# Altium PCB PCB1-V2.PcbDoc
Units mm, origin at the board's own origin, x right, y up, seen from the top; angles counter-clockwise.
Board outline 51.43 x 39.37 mm, 2 copper layers (Top Layer, Bottom Layer), stack 0.833 mm thick; 72 components, 40 nets, 220 pads, 157 vias.
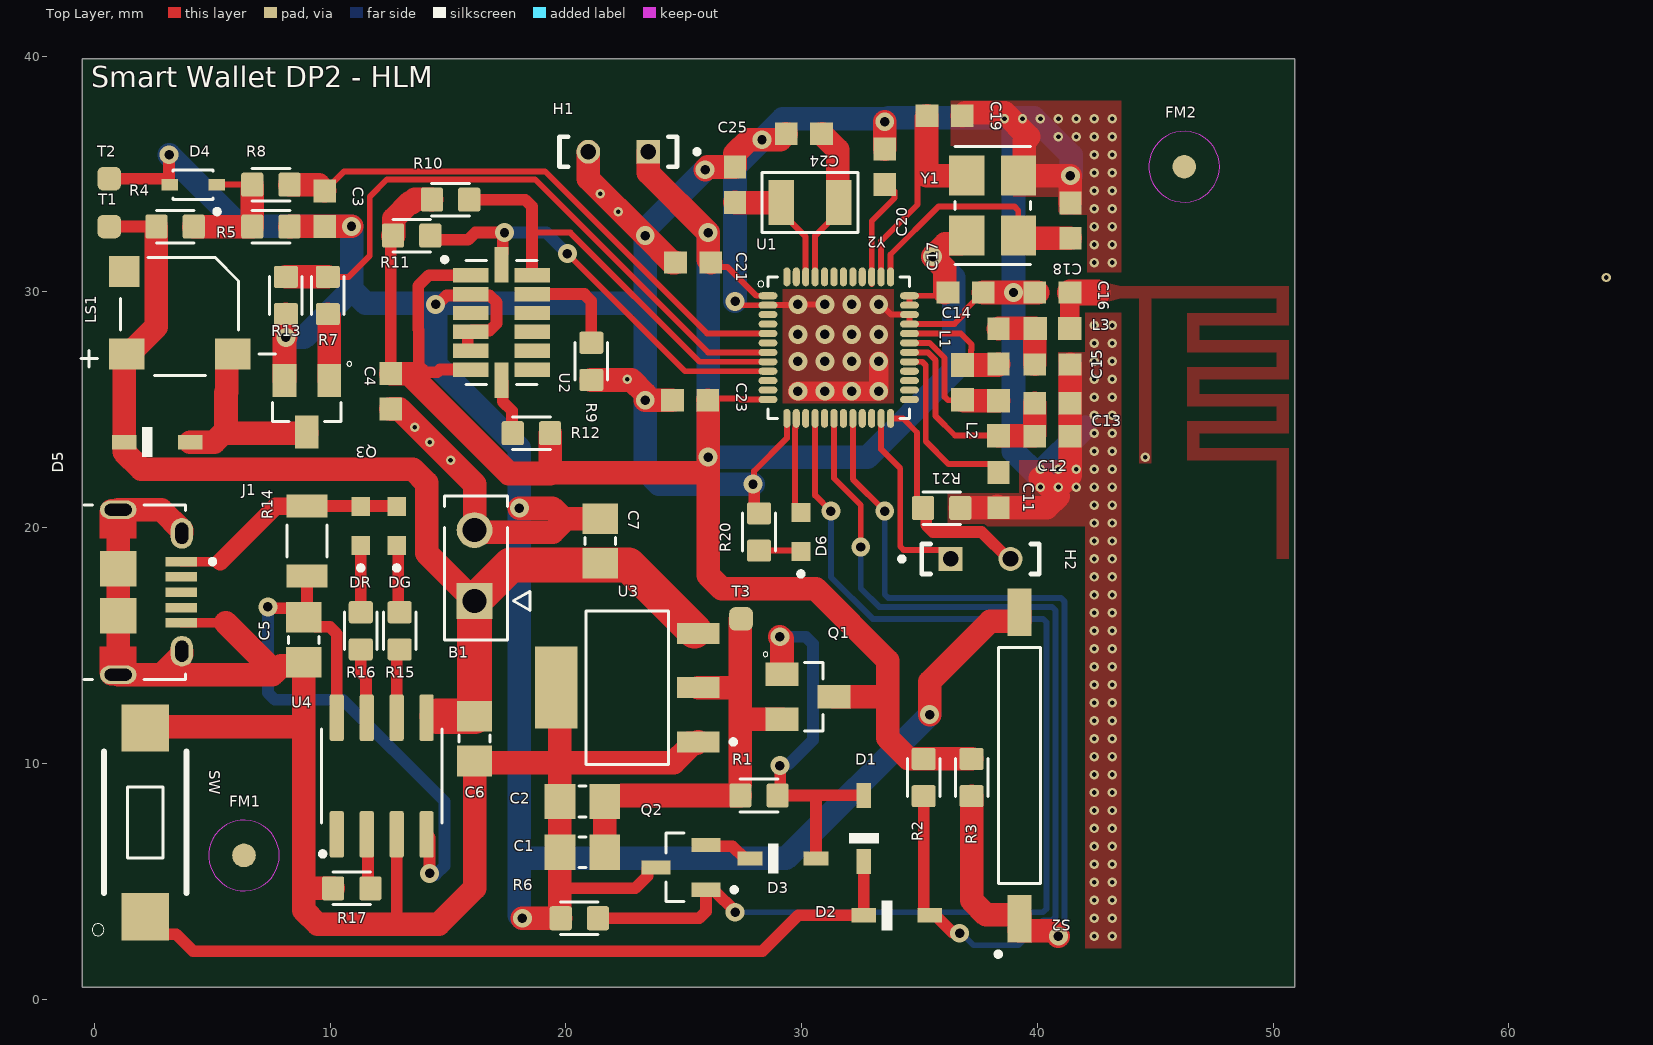
[diagram p0: Top Layer view]
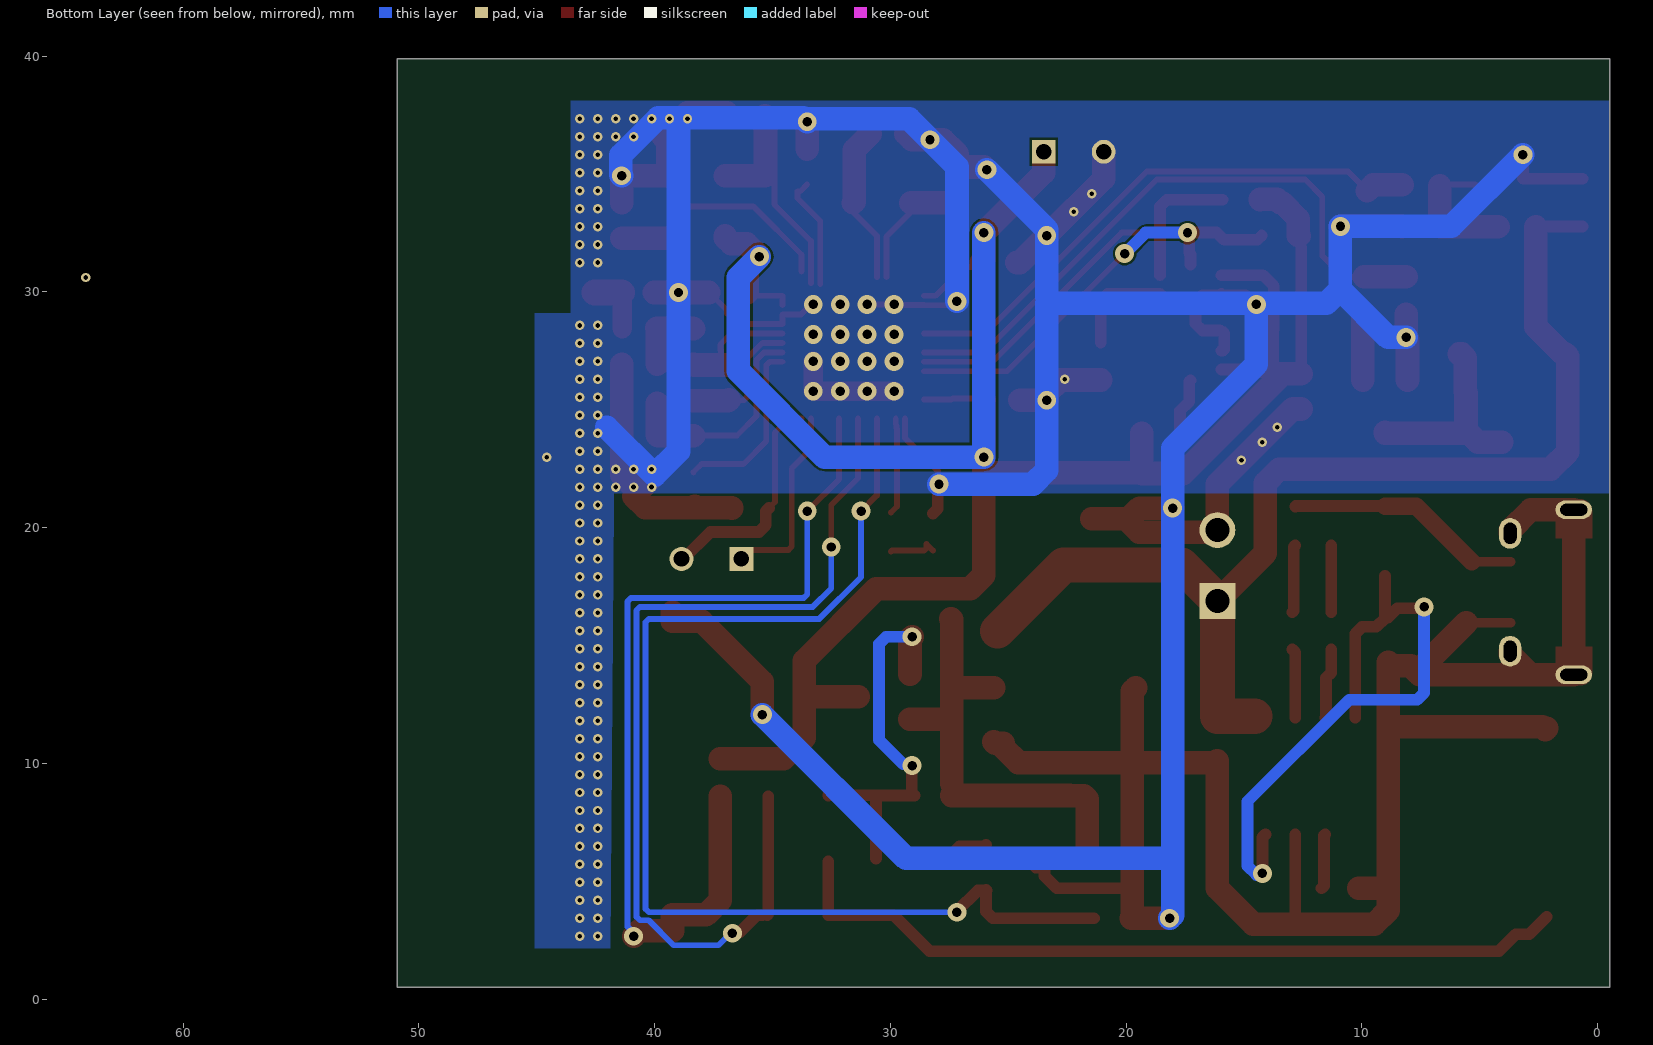
[diagram p1: Bottom Layer view, seen from below]
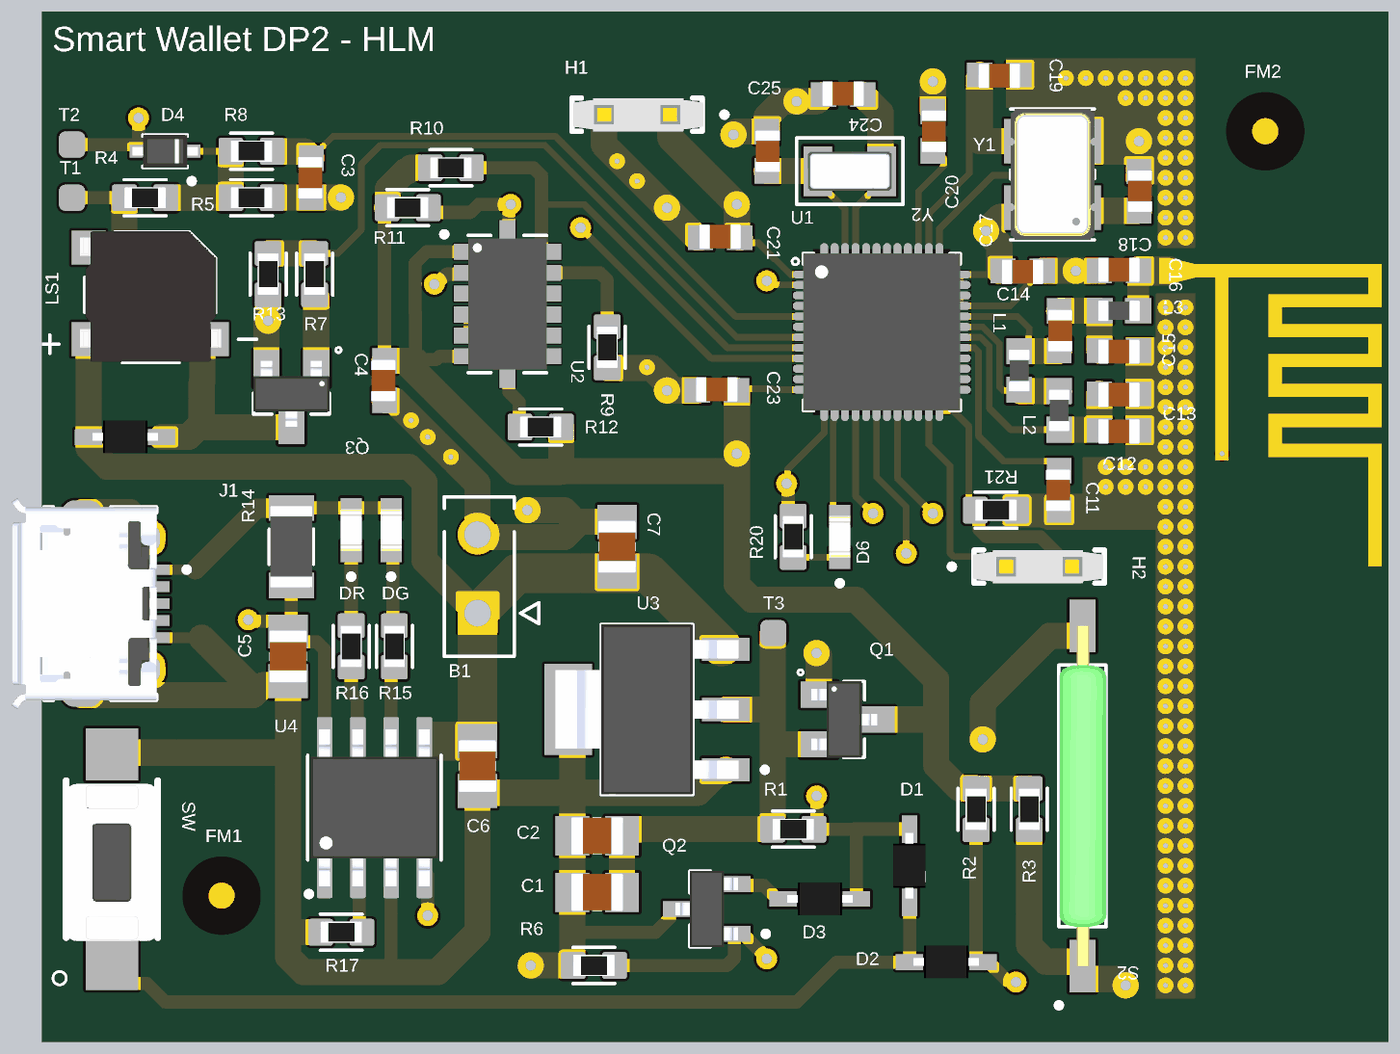
[diagram p2: 3D render of the assembled board from above, using the file's embedded part models]

## Layer stack, top to bottom
Top Solder: solder mask 0.0102, Solder Resist, Dk 3.5
Top Layer: signal copper 0.0356
Dielectric 1: dielectric 0.762, FR-4, Dk 4.8
Bottom Layer: signal copper 0.0356
Bottom Solder: solder mask 0.0102, Solder Resist, Dk 3.5

## Board outline
-0.508,0.508 50.927,0.508 50.927,39.878 -0.508,39.878

## Design rules (kind name [scope] priority, off if disabled: settings)
Clearance [All] p1: gap=0.09 ignorepadtopadclearanceinfootprint=FALSE
DiffPairsRouting [All] p1: maxlimit=0.254 minlimit=0.254 mostfreqgap=0.254 toplayer_minwidth=0.25 toplayer_maxwidth=0.5 toplayer_prefwidth=0.381 bottomlayer_minwidth=0.25 bottomlayer_maxwidth=0.5 bottomlayer_prefwidth=0.381 maxuncoupledlength=12.7
HoleSize [All] p1: absolutevalues=TRUE maxlimit=3.5 minlimit=0.025 maxpercent=80.000 minpercent=20.000
MinimumSolderMaskSliver [All] p1: minsoldermaskwidth=0.04
PolygonConnect [All] p1: connectstyle=Direct reliefconductorwidth=0.254 reliefentries=4 polygonreliefangle="90 Angle" airgapwidth=0.254
RoutingVias [All] p1: holewidth=3.6 width=7 viastyle="Through Hole" minholewidth=0.711 minwidth=1.27 maxholewidth=3.6 maxwidth=7 useviatemplates=TRUE viatemplateguid#1={999FEDD0-366D-4469-89EB-84A90AEF3A53} viatemplateguid#2={0AFC9970-2C97-4F59-B343-C81B69264AC9} viatemplatename#1=v40h20 viatemplatename#2=v80h40
SilkToSolderMaskClearance [IsPad] p1: minsilkscreentomaskgap=0.086 clearancetoexposedcopper=TRUE
SolderMaskExpansion [All] p1: expansion=0.102 istentingtop=FALSE
SupplyNets "Schematic Supply Nets_4" [InNet('OUT')] p1: voltage=0.000
SupplyNets "Schematic Supply Nets_3" [InNet('5V')] p2: voltage=0.000
SupplyNets "Schematic Supply Nets_2" [InNet('GND')] p3: voltage=0.000
SupplyNets "Schematic Supply Nets_1" [InNet('3V3')] p4: voltage=0.000
SupplyNets "Schematic Supply Nets" [InNet('VCC')] p5: voltage=0.000
UnRoutedNet [All] p1 off:
Width [All] p1: maxlimit=1.5 minlimit=0.25 preferedwidth=1 bottomlayer_maxwidth=1 bottomlayer_prefwidth=0.5 minimp=50.000000 maximp=50.000000 favimp=50.000000
25 further rules are at their usual default settings.

## Components (designator, comment, footprint, x,y, rotation, side; value= is the part's Value field where it differs from the comment)
B1 "Molex" MOLEX_430450227 16.129,16.891 r0 top
C1 "4.7uF" CAPC2012X135N 20.701,6.223 r180 top
C2 "0.1uF" CAPC2012X135N 20.701,8.382 r180 top
C3 "0.1uF" CAPC1608X94N 9.779,33.528 r270 top
C4 "Capacitor" CAPC1608X94N 12.573,25.781 r270 top
C5 "10uF" CAPC2012X135N 8.89,15.24 r270 top
C6 "10uF" CAPC2012X135N 16.129,11.049 r270 top
C7 "1uF" CAPC2012X135N 21.463,19.431 r90 top
C11 "0.1uF" CAPC1608X94N 38.354,21.59 r270 top
C12 "2.2nF" CAPC1608X94N 40.64,23.876 r0 top
C13 "0.5pF" CAPC1608X94N 40.64,25.273 r0 top
C14 "2pF" CAPC1608X94N 38.354,27.686 r90 top
C15 "0.5pF" CAPC1608X94N 40.64,26.924 r0 top
C16 "1.5pF" CAPC1608X94N 40.64,29.972 r180 top
C17 "0.1uF" CAPC1608X94N 36.957,29.972 r0 top
C18 "22pF" CAPC1608X94N 41.402,33.02 r90 top
C19 "22pF" CAPC1608X94N 36.068,37.465 r0 top
C20 "0.1uF" CAPC1608X94N 33.528,35.306 r90 top
C21 "0.1uF" CAPC1608X94N 25.4,31.242 r180 top
C23 "0.1uF" CAPC1608X94N 25.273,25.4 r180 top
C24 "22pF" CAPC1608X94N 30.099,36.703 r180 top
C25 "22pF" CAPC1608X94N 27.178,34.544 r90 top
D1 "1N4148WS" 1N4148WS 32.639,7.239 r90 top
D2 "1N4148WS" 1N4148WS 34.036,3.556 r0 top
D3 "1N4148WS" 1N4148WS 29.21,5.969 r0 top
D4 "Zener 3.6v" DIO_BZT52C3V6S 4.191,34.544 r180 top
D5 "1N4148WS" 1N4148WS 2.667,23.622 r0 top
D6 "LED Test" LED_KP-1608SURCK 29.972,19.812 r90 top
DG "LG" LED_KP-1608SURCK 12.827,20.066 r90 top
DR "LR" LED_KP-1608SURCK 11.303,20.066 r90 top
FM1 "Fiducial" Fiducial 6.35,6.096 r0 top
FM2 "Fiducial" Fiducial 46.228,35.306 r0 top
H1 "Header" SAMTEC_TMS-101-51-G-D 22.225,35.941 r270 top
H2 "Header" SAMTEC_TMS-101-51-G-D 37.592,18.669 r90 top
J1 "MicroUSB Type B" MicroUSB 1.016,17.256 r270 top
L1 "3.3nH" INDC1608X95N 36.83,26.162 r90 top
L2 "10nH" INDC1608X95N 38.354,24.638 r90 top
L3 "3.3nH" INDC1608X95N 40.64,28.448 r0 top
LS1 "SMT-0540-S-R" SMT-0540-S-R 3.62,28.961 r0 top
Q1 "FDN340P" SOT95P240X120-3N 30.269,12.827 r0 top
Q2 "BSS138LT1G" SOT95P237X111-3N 24.892,5.588 r180 top
Q3 "MMBT2222A" SOT95P240X120-3N 9.017,25.146 r270 top
R1 "10kΩ" RESC1608X50N 28.194,8.636 r180 top
R2 "10kΩ" RESC1608X50N 35.179,9.398 r270 top
R3 "220Ω" RESC1608X50N 37.211,9.398 r270 top
R4 "10KΩ" RESC1608X50N 3.429,32.766 r0 top
R5 "10KΩ" RESC1608X50N 7.493,32.766 r180 top
R6 "1MΩ" RESC1608X50N 20.574,3.429 r0 top
R7 "220Ω" RESC1608X50N 9.906,29.845 r90 top
R8 "10Ω" RESC1608X50N 7.493,34.544 r180 top
R9 "4.7kΩ" RESC1608X50N 21.082,27.051 r270 top
R10 "4.7kΩ" RESC1608X50N 15.113,33.909 r180 top
R11 "4.7kΩ" RESC1608X50N 13.462,32.385 r180 top
R12 "10kΩ" RESC1608X50N 18.542,24.003 r0 top
R13 "1MΩ" RESC1608X50N 8.128,29.845 r90 top
R14 "0.4 Ω" RESC3116X65N 9.017,19.431 r90 top
R15 "1kΩ" RESC1608X50N 12.954,15.621 r90 top
R16 "1kΩ" RESC1608X50N 11.303,15.621 r90 top
R17 "1.2kΩ" RESC1608X50N 10.922,4.699 r180 top
R20 "220Ω" RESC1608X50N 28.194,19.812 r270 top
R21 "10k" RESC1608X50N 35.941,20.828 r180 top
S2 "Reed Switch" SW_PMC-1001S1015 39.243,9.906 r90 top
SW "Push Button" SW_RS-032G05A3-SMRT 2.159,7.493 r90 top
T1 "TestPoint VCC" Testpoint1 0.635,32.766 r0 top
T2 "TestPoint GND" Testpoint1 0.635,34.798 r0 top
T3 "TestPoint 3.3V" Testpoint1 27.432,16.129 r0 top
U1 "NRF51822-QFAA-R7" nRf51822 31.575,27.632 r0 top
U2 "ADXL345" PQFN80P500X300X100-14N 17.272,28.702 r0 top
U3 "AP7361-33ER-13" *SOT230P700X180-4N 22.606,13.208 r180 top
U4 "TP4056" tp4056 12.192,9.46 r90 top
Y1 "ASFL1-16.000MHZ-EC-T" XTAL_ASFL1-16.000MHZ-EC-T 38.1,33.655 r180 top
Y2 "32.768KHZ" XTAL320X150X75 30.353,33.782 r180 top

## Footprints (in the part's own frame and the unit in brackets; to place one, negate y for a bottom-side part, rotate by r counter-clockwise, add the part's x,y. Pads: shape width x height; smd on the part's side, far side on the other; paste and mask are expansions set on the pad)
1N4148WS [mm] "SOD323"
  rect 1.05x0.6 smd: A(1.4,0) C(-1.4,0)
  silkscreen extent -0.63,-0.63 -0.2,0.63, body extent -1.25,-0.62 1.25,0.64, height 1.1
*SOT230P700X180-4N [mm]
  rect 1.81x0.89 smd: 1(-3.01,2.3) 2(-3.01,0) 3(-3.01,-2.3)
  rect 1.81x3.481 smd: 4(3.01,0)
  silkscreen extent -4.6,-3.25 1.75,3.25, body extent -3.5,-3.25 3.5,3.25, height 1.63
CAPC1608X94N [mm]
  rect 0.97x0.94 smd: 1(-0.75,0) 2(0.75,0)
  body extent -0.8,-0.51 0.8,0.43, height 0.8
CAPC2012X135N [mm]
  rect 1.3x1.5 smd: 1(-0.95,0) 2(0.95,0)
  silkscreen extent -0.15,-0.65 0.15,0.65, body extent -1,-0.72 1,0.72, height 1.22
DIO_BZT52C3V6S [mm]
  rect 0.7x0.5 smd: A(1,0) C(-1,0)
  silkscreen extent -1.12,-0.63 0.85,1.24, body extent -1.25,-0.63 1.25,0.63, height 1.1
Fiducial [mm]
  round 1 smd paste-1 mask+1: 1(0,0)
  Top Layer keep-out circle w0.01: c0,0 r1.5
  body extent -0.5,-0.5 0.5,0.5
INDC1608X95N [mm]
  rect 1x0.97 smd: 1(-0.735,0) 2(0.735,0)
  body extent -0.8,-0.4 0.8,0.4, height 0.95
LED_KP-1608SURCK [mm]
  rect 0.8x0.8 smd: 1(0.825,0) 2(-0.825,0)
  silkscreen extent -1.88,-0.1 -1.68,0.1, body extent -0.8,-0.4 0.8,0.4, height 1.1
MicroUSB [mm]
  rect 0.4x1.35 smd: 1(-1.3,2.675) 2(-0.65,2.675) 3(0,2.675) 4(0.65,2.675) 5(1.3,2.675)
  oval 0.775x1.55 hole 0.5 slot 1.15 at 90 deg mask+0: SH1(-3.5,0) SH4(3.5,0)
  rect 1.5x1.55 smd: SH2(1,0) SH3(-1,0)
  oval 1.3x0.95 hole 0.55 slot 0.9 at 0 deg: SH5(-2.5,2.7) SH6(2.5,2.7)
  Top Layer region: 3.471,0.774 3.497,0.772 3.523,0.769 3.549,0.764 3.574,0.758 3.6,0.751 3.624,0.742 3.648,0.732 3.672,0.721 3.695,0.708 3.717,0.694 3.739,0.68 3.76,0.664 3.78,0.647 3.799,0.629 3.817,0.61 3.834,0.59 3.85,0.569 3.864,0.547 3.878,0.525 3.891,0.502 3.902,0.478 3.912,0.454 3.921,0.43 3.928,0.404 3.934,0.379 3.939,0.353 3.942,0.327 3.944,0.301 3.945,0.275 3.945,-0.275 3.944,-0.301 3.942,-0.327 3.939,-0.353 3.934,-0.379 3.928,-0.404 3.921,-0.43 3.912,-0.454 3.902,-0.478 3.891,-0.502 3.878,-0.525 3.864,-0.547 3.85,-0.569 3.834,-0.59 3.817,-0.61 3.799,-0.629 3.78,-0.647 3.76,-0.664 3.739,-0.68 3.717,-0.694 3.695,-0.708 3.672,-0.721 3.648,-0.732 3.624,-0.742 3.6,-0.751 3.574,-0.758 3.549,-0.764 3.523,-0.769 3.497,-0.772 3.471,-0.774 3.445,-0.775 2.3,-0.775 2.3,0.775 3.445,0.775
  Top Layer region: -2.3,-0.775 -3.445,-0.775 -3.471,-0.774 -3.497,-0.772 -3.523,-0.769 -3.549,-0.764 -3.574,-0.758 -3.6,-0.751 -3.624,-0.742 -3.648,-0.732 -3.672,-0.721 -3.695,-0.708 -3.717,-0.694 -3.739,-0.68 -3.76,-0.664 -3.78,-0.647 -3.799,-0.629 -3.817,-0.61 -3.834,-0.59 -3.85,-0.569 -3.864,-0.547 -3.878,-0.525 -3.891,-0.502 -3.902,-0.478 -3.912,-0.454 -3.921,-0.43 -3.928,-0.404 -3.934,-0.379 -3.939,-0.353 -3.942,-0.327 -3.944,-0.301 -3.945,-0.275 -3.945,0.275 -3.944,0.301 -3.942,0.327 -3.939,0.353 -3.934,0.379 -3.928,0.404 -3.921,0.43 -3.912,0.454 -3.902,0.478 -3.891,0.502 -3.878,0.525 -3.864,0.547 -3.85,0.569 -3.834,0.59 -3.817,0.61 -3.799,0.629 -3.78,0.647 -3.76,0.664 -3.739,0.68 -3.717,0.694 -3.695,0.708 -3.672,0.721 -3.648,0.732 -3.624,0.742 -3.6,0.751 -3.574,0.758 -3.549,0.764 -3.523,0.769 -3.497,0.772 -3.471,0.774 -3.445,0.775 -2.3,0.775
  silkscreen extent -3.7,-1.45 3.7,4.1, body extent -4.02,-2.68 4.02,2.85, height 2.67
MOLEX_430450227 [mm]
  rect 1.52x1.52 / inner round 1.52 / far side rect 1.52x1.52 hole 1.02 mask+0.076: 1(0,0)
  round 1.52 hole 1.02 mask+0.076: 2(0,3)
  silkscreen extent -1.27,-1.65 2.34,4.44
nRf51822 [mm]
  oval 0.8x0.3 smd mask+0: 1(-3,2.2) 2(-3,1.8) 3(-3,1.4) 4(-3,1) 5(-3,0.6) 6(-3,0.2) 7(-3,-0.2) 8(-3,-0.6) 9(-3,-1) 10(-3,-1.4) 11(-3,-1.8) 12(-3,-2.2) 25(3,-2.2) 26(3,-1.8) 27(3,-1.4) 28(3,-1) 29(3,-0.6) 30(3,-0.2) 31(3,0.2) 32(3,0.6) 33(3,1) 34(3,1.4) 35(3,1.8) 36(3,2.2)
  oval 0.3x0.8 smd mask+0: 13(-2.2,-3) 14(-1.8,-3) 15(-1.4,-3) 16(-1,-3) 17(-0.6,-3) 18(-0.2,-3) 19(0.2,-3) 20(0.6,-3) 21(1,-3) 22(1.4,-3) 23(1.8,-3) 24(2.2,-3) 37(2.2,3) 38(1.8,3) 39(1.4,3) 40(1,3) 41(0.6,3) 42(0.2,3) 43(-0.2,3) 44(-0.6,3) 45(-1,3) 46(-1.4,3) 47(-1.8,3) 48(-2.2,3)
  silkscreen extent -3.43,-3 3,3, body extent -3,-3 3,3, height 0.93
PQFN80P500X300X100-14N [mm]
  rect 1.5x0.61 smd mask+0.05: 1(-1.3,2) 2(-1.3,1.2) 3(-1.3,0.4) 4(-1.3,-0.4) 5(-1.3,-1.2) 6(-1.3,-2) 8(1.3,-2) 9(1.3,-1.2) 10(1.3,-0.4) 11(1.3,0.4) 12(1.3,1.2) 13(1.3,2)
  rect 0.61x1.5 smd mask+0.05: 7(0,-2.45) 14(0,2.45)
  silkscreen extent -2.51,-2.63 1.5,2.77, body extent -1.5,-2.5 1.5,2.5, height 1
RESC1608X50N [mm]
  rrect20% 0.94x1.02 smd: 1(-0.79,0) 2(0.79,0)
  silkscreen extent -0.8,-0.69 0.8,0.69, body extent -0.8,-0.4 0.8,0.4, height 0.43
RESC3116X65N [mm]
  rect 0.97x1.73 smd: 1(-1.48,0) 2(1.48,0)
  silkscreen extent -0.67,-0.85 0.67,0.85, body extent -1.55,-0.8 1.55,0.8, height 0.65
SAMTEC_TMS-101-51-G-D [mm]
  rect 1.01x1.01 / inner round 1.01 / far side rect 1.01x1.01 hole 0.66: 01(0,1.27)
  round 1.01 hole 0.66: 02(0,-1.27)
  silkscreen extent -0.64,-2.49 0.64,3.44, body extent -0.64,-2.44 0.64,2.54, height 7.35
SMT-0540-S-R [mm]
  rect 1.3x1.3 smd: 3(-2.35,1.9)
  rect 1.5x1.3 smd: LEAD+(-2.25,-1.6) LEAD-(2.25,-1.6)
  silkscreen extent -4.19,-2.5 4.07,2.5, body extent -2.68,-2.47 2.72,2.53, height 1.99
SOT95P237X111-3N [mm]
  rect 1.23x0.6 smd: 1(-1.06,0.95) 2(-1.06,-0.95) 3(1.06,0)
  silkscreen extent -2.35,-1.45 0.65,1.45, body extent -1.2,-1.46 1.2,1.46, height 1.2
SOT95P240X120-3N [mm]
  rect 1.4x1 smd: 1(-1.1,0.95) 2(-1.1,-0.95) 3(1.1,0)
  silkscreen extent -1.9,-1.45 0.65,1.9, body extent -1.38,-1.46 1.13,1.46, height 1.12
SW_PMC-1001S1015 [mm]
  rect 2x1 smd: 1(-6.5,0) 2(6.5,0)
  silkscreen extent -8.1,-0.9 5,1, body extent -6.5,-0.91 6.5,0.87, height 0.9
SW_RS-032G05A3-SMRT [mm]
  rect 2x2 smd: 1(-4,0) 2(4,0)
  silkscreen extent -4.8,-1.75 3,2.25, body extent -4.13,-1.75 3.87,1.75, height 2.3
Testpoint1 [mm]
  rrect50% 1x1 smd: 1(0,0)
tp4056 [mm]
  rrect25% 1.97x0.6 smd mask+0: 1(-2.475,1.905) 2(-2.475,0.635) 3(-2.475,-0.635) 4(-2.475,-1.905) 5(2.475,-1.905) 6(2.475,-0.635) 7(2.475,0.635) 8(2.475,1.905)
  silkscreen extent -3.4,-2.55 2,2.6, body extent -3,-2.45 3,2.45, height 1.75
XTAL320X150X75 [mil]
  rect 43x75 smd: 1(-48,0) 2(48,0)
  silkscreen extent -80,-50 80,50, body extent -63,-30 63,30, height 33
XTAL_ASFL1-16.000MHZ-EC-T [mm]
  rect 1.5x1.7 smd: 1(-1.1,1.27) 2(-1.1,-1.27) 3(1.1,-1.27) 4(1.1,1.27)
  silkscreen extent -1.6,-2.5 1.6,2.5, body extent -1.6,-2.5 1.6,2.5, height 1.28

## Part data
B1 LS1 Y1: Package=None, Availability=Unavailable, Price=None
  B1: MP=430450227
  LS1: MF="{'manufacturer': u'PUI Audio, Inc.'}", MP=SMT-0540-S-R
  Y1: MP=ASFL1-16.000MHZ-EC-T
C1: library part GCM21BR71H104KA37K, "SMD Capacitor X7R(EIA) with Capacitance: 4.7uF Tol. 10%. Rated Voltage: 50Vdc", Package="0805 Murata", Arrow_Electronics-Purchase-URL=https://snapeda.com/shop?store=Arrow+Electronics&id=1764792, Availability=Good, DigiKey-Purchase-URL=https://snapeda.com/shop?store=DigiKey&id=1764792, MF=Murata, MP=GCM21BR71H104KA37K, Price=None, SnapEDA_Link=https://www.snapeda.com/parts/GCM21BR71H104KA37K/Murata%20Electronics%20North%20America/view-part/1764792/?ref=snap
C2: library part GCM21BR71H104KA37K, "SMD Capacitor X7R(EIA) with Capacitance: 0.10uF Tol. 10%. Rated Voltage: 50Vdc", Package="0805 Murata", Arrow_Electronics-Purchase-URL=https://snapeda.com/shop?store=Arrow+Electronics&id=1764792, Availability=Good, DigiKey-Purchase-URL=https://snapeda.com/shop?store=DigiKey&id=1764792, MF=Murata, MP=GCM21BR71H104KA37K, Price=None, SnapEDA_Link=https://www.snapeda.com/parts/GCM21BR71H104KA37K/Murata%20Electronics%20North%20America/view-part/1764792/?ref=snap
C3: library part Capacitor, "CAP 0603 0.1uF", Package=None, Availability=Unavailable, MP=VJ0603D100MXCAP, Price=None
C4: "CAP 0603 0.1uF", Package=None, Availability=Unavailable, MP=VJ0603D100MXCAP, Price=None
C5 C6: library part GCM21BR71H104KA37K, "SMD Capacitor X7R(EIA) with Capacitance: 10uF Tol. 10%. Rated Voltage: 50Vdc", Package="0805 Murata", Arrow_Electronics-Purchase-URL=https://snapeda.com/shop?store=Arrow+Electronics&id=1764792, Availability=Good, DigiKey-Purchase-URL=https://snapeda.com/shop?store=DigiKey&id=1764792, MF=Murata, MP=GCM21BR71H104KA37K, Price=None, SnapEDA_Link=https://www.snapeda.com/parts/GCM21BR71H104KA37K/Murata%20Electronics%20North%20America/view-part/1764792/?ref=snap
C7: library part GCM21BR71H104KA37K, "CAP 0603 1uF", Package="0805 Murata", Arrow_Electronics-Purchase-URL=https://snapeda.com/shop?store=Arrow+Electronics&id=1764792, Availability=Good, DigiKey-Purchase-URL=https://snapeda.com/shop?store=DigiKey&id=1764792, MF=Murata, MP=GCM21BR71H104KA37K, Price=None, SnapEDA_Link=https://www.snapeda.com/parts/GCM21BR71H104KA37K/Murata%20Electronics%20North%20America/view-part/1764792/?ref=snap
C11 C17 C20 C21 C23: library part CAP, "CAP 0603 0.1uF", Package=None, Availability=Unavailable, MP=VJ0603D100MXCAP, Price=None
C12: library part CAP, "CAP 0603 2.2nF", Package=None, Availability=Unavailable, MP=VJ0603D100MXCAP, Price=None
C13: library part Capacitor, "CAP 0603 0.5pF", Package=None, Availability=Unavailable, MP=VJ0603D100MXCAP, Price=None
C14: library part CAP, "CAP 0603 2pF", Package=None, Availability=Unavailable, MP=VJ0603D100MXCAP, Price=None
C15: library part CAP, "CAP 0603 0.5pF", Package=None, Availability=Unavailable, MP=VJ0603D100MXCAP, Price=None
C16: library part CAP, "CAP 0603 1.5pF", Package=None, Availability=Unavailable, MP=VJ0603D100MXCAP, Price=None
C18 C19 C24 C25: library part CAP, "CAP 0603 22pF", Package=None, Availability=Unavailable, MP=VJ0603D100MXCAP, Price=None
D1 D2 D3 D5: "1N4148WS, SOD-323F, 100V, 0,15A, 150°C", Package="SOD-323F Diotec", Check_prices=https://www.snapeda.com/parts/1N4148WS/Diotec/view-part/?ref=eda, MF="Diotec Semiconductor", MP=1N4148WS, SnapEDA_Link=https://www.snapeda.com/parts/1N4148WS/Diotec/view-part/?ref=snap
D4: library part BZT52C3V6S, "Zener Diode 3.6 V 200 mW Â±5% Surface Mount SOD-323F", Package="SOD-323F-2 Taiwan Semiconductor", Check_prices=https://www.snapeda.com/parts/BZT52C3V6S/Taiwan+Semiconductor/view-part/?ref=eda, MF="Taiwan Semiconductor", MP=BZT52C3V6S, SnapEDA_Link=https://www.snapeda.com/parts/BZT52C3V6S/Taiwan+Semiconductor/view-part/?ref=snap
D6: library part "LED 0603", "LED; SMD; 0603; red; 50-150mcd; 1.6x0.8mm; 120Â°; 20mA;", Package="0603 Kingbright", Check_prices=https://www.snapeda.com/parts/KP-1608SURCK/Kingbright/view-part/?ref=eda, MF=Kingbright, MP=KP-1608SURCK, SnapEDA_Link=https://www.snapeda.com/parts/KP-1608SURCK/Kingbright/view-part/?ref=snap
DG: library part "LED 0603", "LED 0603 SMD White", Package="0603 Kingbright", Check_prices=https://www.snapeda.com/parts/KP-1608SURCK/Kingbright/view-part/?ref=eda, MF=Kingbright, MP=KP-1608SURCK, SnapEDA_Link=https://www.snapeda.com/parts/KP-1608SURCK/Kingbright/view-part/?ref=snap
DR: library part "LED 0603", "LED 0603 SMD Red", Package="0603 Kingbright", Check_prices=https://www.snapeda.com/parts/KP-1608SURCK/Kingbright/view-part/?ref=eda, MF=Kingbright, MP=KP-1608SURCK, SnapEDA_Link=https://www.snapeda.com/parts/KP-1608SURCK/Kingbright/view-part/?ref=snap
FM1 FM2: library part FM?
H1 H2: "Connector Header Through Hole 2 position", Package=None, Availability="In Stock", Check_prices=https://www.snapeda.com/parts/TMS-101-51-G-D/Samtec/view-part/?ref=eda, MF=Samtec, MP=TMS-101-51-G-D, Price=None, Purchase-URL=https://pricing.snapeda.com/search/part/TMS-101-51-G-D/?ref=eda, SnapEDA_Link=https://www.snapeda.com/parts/TMS-101-51-G-D/Samtec/view-part/?ref=snap
J1: "Micro USB, Input Output Connectors, B TYPE RECEPTACLE with flange", Package=None, Check_prices=https://www.snapeda.com/parts/10118194-0001LF/Amphenol+FCI/view-part/?ref=eda, MF="Amphenol ICC", MP=10118194-0001LF, SnapEDA_Link=https://www.snapeda.com/parts/10118194-0001LF/Amphenol+FCI/view-part/?ref=snap
L1 L3: library part L, "Inductor with Inductance 3.3nH Package 0603 (1608)", Package="0603 Murata", Availability=Unavailable, MF="Murata Electronics", MP=LQM18DN100M70L, Price=None, SnapEDA_Link=https://www.snapeda.com/parts/LQM18DN100M70L/Murata/view-part/4834755/?ref=snap
L2: library part L, "Inductor with Inductance 10nH Package 0603 (1608)", Package="0603 Murata", Availability=Unavailable, MF="Murata Electronics", MP=LQM18DN100M70L, Price=None, SnapEDA_Link=https://www.snapeda.com/parts/LQM18DN100M70L/Murata/view-part/4834755/?ref=snap
Q1: "FDN340P Series 20V 70 mOhm Single P-Ch Logic Level PowerTrench Mosfet SSOT-3", Package=None, Availability=Unavailable, MP=FDN340P, Price=None
Q2: "N-Channel 50 V 200mA (Ta) 225mW (Ta) Surface Mount SOT-23-3 (TO-236)", Package="SOT-23-3 Motorola", Check_prices=https://www.snapeda.com/parts/BSS138LT1G/Onsemi/view-part/?ref=eda, MF=onsemi, MP=BSS138LT1G, SnapEDA_Link=https://www.snapeda.com/parts/BSS138LT1G/Onsemi/view-part/?ref=snap
Q3: "BJT, SOT-23, 40V, 600mA, NPN, 0.25W, 150°C", Package="SOT-23 Diotec", Check_prices=https://www.snapeda.com/parts/MMBT2222A/Diotec/view-part/?ref=eda, MF="Diotec Semiconductor", MP=MMBT2222A, SnapEDA_Link=https://www.snapeda.com/parts/MMBT2222A/Diotec/view-part/?ref=snap
R1 R2 R12 R21: library part "RES 0603", "10kΩ 0603 Chip Resistor", Package=None, Availability=Unavailable, MP=4-2176243-5, Price=None
R3 R7 R20: library part "RES 0603", "220Ω 0603 Chip Resistor", Package=None, Availability=Unavailable, MP=4-2176243-5, Price=None
R4 R5: library part "RES 0603", "10KΩ 0603 Chip Resistor", Package=None, Availability=Unavailable, MP=4-2176243-5, Price=None
R6 R13: library part "RES 0603", "1MΩ 0603 Chip Resistor", Package=None, Availability=Unavailable, MP=4-2176243-5, Price=None
R8: library part "RES 0603", "10Ω 0603 Chip Resistor", Package=None, Availability=Unavailable, MP=4-2176243-5, Price=None
R9 R10 R11: library part "RES 0603", "4.7kΩ 0603 Chip Resistor", Package=None, Availability=Unavailable, MP=4-2176243-5, Price=None
R14: library part RC1206JR-07220RL, "0.4Ω Â±5% 0.25W, 1/4W Chip Resistor 1206 (3216 Metric) Thick Film", Package="3116 Yageo", Check_prices=https://www.snapeda.com/parts/RC1206JR-07220RL/Yageo/view-part/615364/?ref=eda, Digi-Key_Part_Number=311-220ERCT-ND, MF=Yageo, MP=RC1206JR-07220RL, SnapEDA_Link=https://www.snapeda.com/parts/RC1206JR-07220RL/Yageo/view-part/615364/?ref=snap
R15 R16: library part "RES 0603", "1kΩ 0603 Chip Resistor", Package=None, Availability=Unavailable, MP=4-2176243-5, Price=None
R17: library part "RES 0603", "1.2kΩ 0603 Chip Resistor", Package=None, Availability=Unavailable, MP=4-2176243-5, Price=None
S2: library part PMC-1001S1015, Package=None, Availability=Unavailable, MP=PMC-1001S1015, Price=None
SW: library part RS-032G05A3-SMRT, "Tactile Switch SPST-NO Top Actuated Surface Mount", Package=None, Availability=Unavailable, MF=C&K, MP=RS032G05A3SMRT, Price=None, SnapEDA_Link=https://www.snapeda.com/parts/RS032G05A3SMRT/C%26K/view-part/578384/?ref=snap
T1 T2 T3: library part T?
U1: "IC RF TxRx + MCU Bluetooth, General ISM > 1GHz Bluetooth v4.0 2.4GHz 48-VFQFN Exposed Pad", Package="VFQFN-48 Nordic Semiconductor", Digi-Key_Part_Number=1490-1031-1-ND, Digi-Key_Purchase_URL=https://www.digikey.com/product-detail/en/nordic-semiconductor-asa/NRF51822-QFAA-R7/1490-1031-1-ND/4626399?utm_source=snapeda&utm_medium=aggregator&utm_campaign=symbol, MF=Nordic, MP=NRF51822-QFAA-R7, SnapEDA_Link=https://www.snapeda.com/parts/NRF51822-QFAA-R7/Nordic%20Semiconductor%20ASA/view-part/50620/?ref=snap
U2: "Accelerometer X, Y, Z Axis ±2g, 4g, 8g, 16g 0.05Hz ~ 1.6kHz 14-LGA (3x5)", Package="LGA -14 Analog Devices", Check_prices=https://www.snapeda.com/parts/ADXL345/Analog+Devices/view-part/?ref=eda, MF="Analog Devices, Inc.", MP=ADXL345, SnapEDA_Link=https://www.snapeda.com/parts/ADXL345/Analog+Devices/view-part/?ref=snap
U4: "Complete single cell Li-Ion battery with a constant current / constant voltage linear charger", Package=Package, Availability="Not in stock", Check_prices=https://www.snapeda.com/parts/TP4056/NanJing+Top+Power+ASIC+Corp./view-part/?ref=eda, MF="NanJing Top Power ASIC Corp.", MP=TP4056, Price=None, SnapEDA_Link=https://www.snapeda.com/parts/TP4056/NanJing+Top+Power+ASIC+Corp./view-part/?ref=snap
Y2: library part 9HT10-32.768KAZB-T, "Crystal, 32.768khz, 12.5pf, 3.2 x 1.5mm", Package=None, Availability=Unavailable, MP=9HT10-32.768KAZB-T, Price=None
U3: Check_prices=https://www.snapeda.com/parts/AP7361-33ER-13/Diodes+Inc./view-part/?ref=eda, SnapEDA_Link=https://www.snapeda.com/parts/AP7361-33ER-13/Diodes+Inc./view-part/?ref=snap

## Via types
v1: diameter 0.4, hole 0.201, Top Layer to Bottom Layer, 110 vias
v2: diameter 0.8, hole 0.4, Top Layer to Bottom Layer, 47 vias

## Nets (pads, with @x,y where several pads share a name; then routed paths per layer and width w, separated by ;. In a path a pad name is that pad's centre, name@x,y a point inside that pad or via, vN(x,y) a via of type N, cw(c..) or ccw(c..) an arc to the next point about the centre after c; other vN are vias at no path point)
3V3: C4.1 C17.1 C21.1 C23.1 H1.01 Q1.3 R2.1 R3.1 R10.2 R11.2 R12.2 U1.1 U1.12 U1.35 U1.36 U2.1 U2.6 Y1.4 | length 103.7
  Top Layer w0.25: C23.1 26.093,25.47 27.365,25.47 27.403,25.432 U1.12 ; C21.1 26.51,31.048 26.864,31.048 27.505,30.407 27.507,30.407 28.082,29.832 U1.1 ; U1.35 U1.36 36.067,29.832 36.137,29.903 C17.1@36.068,29.972
  Top Layer w0.5: C4.1 12.573,31.865 12.579,31.871 ; 13.759,26.531 13.759,26.586 ; U2.6 14.665,26.702 14.549,26.586 13.759,26.586 ; U2.1 14.192,30.702 13.738,30.248 13.738,28.4 13.759,28.379 13.759,26.586
  Top Layer w1: C4.1 13.759,26.531 ; R11.2 12.692,32.385 12.702,32.395 12.702,33.099 13.385,33.782 13.462,33.782 13.602,33.922 13.605,33.919 14.313,33.919 R10.2 ; 13.387,26.491 17.584,22.294 19.332,22.294 19.332,22.323 ; R12.2 19.332,22.323 ; H1.01 23.5,35.936 23.5,35.047 v2(26.035,32.512) ; C23.1 26.035,25.388 v2(26.035,22.987) 26.035,22.548 ; v2@26.036,32.511 26.036,31.356 C21.1 ; Q1.3 33.655,12.827 ; C17.1@36.068,29.972 36.068,30.988 v2(35.56,31.496) 36.099,32.035 36.75,32.035 37,32.285 Y1.4 ; R3.1 R2.1 35.169,10.198 34.534,10.198 33.655,11.077 33.655,12.827 ; 19.332,22.323 25.81,22.323 26.035,22.548 ; 26.035,22.548 26.035,17.985 26.621,17.399 30.607,17.399 33.655,14.351 33.655,12.827
  Bottom Layer w0.25: 36.449,29.931 36.496,29.884
  Bottom Layer w1: v2(26.035,32.512) v2(26.035,22.987) 32.794,22.987 36.449,26.642 36.449,29.931 36.449,30.607 v2(35.56,31.496)
5V: DG.1 DR.1 J1.1 R14.2 | length 10.1
  Top Layer w0.4: J1.1 5.348,18.556
  Top Layer w0.5: R14.2@9.009,20.903 R14.2 12.807,20.911 DG.1
  Top Layer w0.75: 5.348,18.556 7.695,20.903 R14.2@9.009,20.903
GND: B1.2 C1.2 C2.2 C3.2 C4.2 C5.2 C6.2 C7.2 C11.2 C12.2 C13.2 C15.2 C16.1 C16.2 C17.2 C18.2 C19.2 C20.2 C21.2 C23.2 C24.2 C25.2 D4.A H1.02 J1.5 J1.SH1 J1.SH2 J1.SH3 J1.SH4 J1.SH5 J1.SH6 L3.2 Q2.3 Q3.2 R5.1 R6.1 R9.2 R13.1 R17.2 R20.1 R21.1 S2.2 SW.2 T2.1 U1.2 U1.13 U1.33 U1.34 U2.2 U2.4 U2.5 U3.1 U3.4 U4.3 Y1.2 | length 316.1
  Top Layer w0.25: v2@27.486,29.432 U1.2 28.585,29.442 29.823,29.442 v2(29.845,29.464) v2(30.988,29.464) ; v2(27.94,21.844) 27.984,21.888 27.984,22.396 29.375,23.787 U1.13 ; v2(33.274,29.464) 33.368,29.464 33.8,29.032 U1.34 U1.33 36.479,28.632 36.932,29.085 36.932,29.212 37.692,29.972 C17.2
  Top Layer w0.4: J1.5 5.586,15.956
  Top Layer w0.5: T2.1 3.175,34.798 v2(3.175,35.814) ; 12.827,3.175 U4.3 ; v2(14.478,29.464) 14.559,29.464 14.942,29.847 15.917,29.847 U2.2 16.027,29.847 16.763,29.847 17.062,29.548 17.062,28.656 16.763,28.357 16.027,28.357 U2.4 15.9,28.302 15.845,28.247 15.845,27.557 15.9,27.502 U2.5 ; 19.751,4.699 22.943,4.699 23.467,5.223 23.467,5.538 23.517,5.588 Q2.3 ; v2(27.94,21.844) 27.997,21.787 27.997,20.799 R20.1 ; C11.2@38.296,20.897 C11.2
  Top Layer w0.838: v2(29.845,25.781) v2(30.988,25.781) v2(32.131,25.781) v2(33.274,25.781) v2(33.274,27.051) ; L3.2 41.375,29.957 C16.1
  Top Layer w1: SW.2 2.222,11.429 2.35,11.557 8.89,11.557 ; J1.SH6 3.716,14.631 2.841,13.756 ; J1.SH5 3.716,19.881 2.841,20.756 J1.SH1 J1.SH3 J1.SH2 J1.SH4 2.841,13.756 ; 5.586,15.956 7.666,13.876 ; Q3.2 8.067,28.006 v2(8.128,28.067) R13.1 ; R5.1 8.303,32.766 8.313,32.776 9.71,32.776 9.712,32.778 C3.2 v2(10.91,32.778) ; R17.2 8.89,4.699 ; C4.2 12.942,25.031 16.129,21.844 B1.2 16.22,19.8 19.443,19.8 19.951,20.308 19.878,20.381 ; C6.2 16.129,4.699 14.605,3.175 12.827,3.175 9.476,3.175 8.89,3.761 8.89,4.699 ; C6.2@16.195,10.033 19.751,10.033 ; v2(18.034,20.828) 19.431,20.828 19.878,20.381 ; v2(18.161,3.429) R6.1 ; U3.4 19.751,13.053 19.751,10.033 ; R6.1@19.751,3.462 19.751,4.699 C1.2 C2.2 19.751,10.033 ; H1.02 20.955,34.798 v2(23.368,32.385) 24.511,31.242 C21.2 ; R9.2 22.782,26.261 23.368,25.675 v2(23.368,25.4) C23.2 ; C7.2 19.878,20.381 ; U3.1 25.561,10.853 25.211,10.853 25.211,10.674 24.57,10.033 19.751,10.033 ; v2(25.908,35.179) 26.023,35.294 C25.2 27.178,35.863 27.764,36.449 v2(28.321,36.449) 29.095,36.449 C24.2 ; C20.2 v2(33.528,37.211) ; v2(35.433,12.065) 35.433,13.462 37.999,16.028 39.243,16.028 S2.2 ; R21.1 36.741,20.838 38.237,20.838 C11.2@38.296,20.897 ; C19.2 36.945,37.592 38.608,37.592 39.631,36.569 39.45,36.388 39.45,35.175 Y1.2 v2(41.402,34.925) C18.2 ; C17.2 v2(38.989,29.972) C16.2 C16.2@40.017,29.972 ; C11.2 40.398,20.84 40.894,21.336 ; 40.132,22.098 40.595,21.635 40.812,21.635 41.39,22.213 C12.2 C13.2 C15.2 ; 2.841,13.756 7.546,13.756 7.666,13.876 ; 7.666,13.876 7.93,14.14 8.74,14.14 C5.2 8.89,11.557 ; 8.89,4.699 8.89,11.557
  Top Layer w1.118: C16.1 42.545,29.972
  Bottom Layer w1: v2(3.175,35.814) 6.211,32.778 v2(10.91,32.778) 10.922,32.766 10.922,30.099 ; v2(8.128,28.067) 8.89,28.067 10.922,30.099 ; v2(18.161,3.429) 18.034,3.556 18.034,5.969 ; 23.368,29.464 v2(23.368,25.4) 23.368,22.43 23.954,21.844 v2(27.94,21.844) ; 23.368,29.512 14.526,29.512 v2(14.478,29.464) ; 23.368,29.766 v2(23.368,32.385) 23.368,32.639 v2(25.908,35.179) ; v2(27.178,29.591) 27.178,35.306 v2(28.321,36.449) 29.21,37.338 33.401,37.338 v2(33.528,37.211) 33.703,37.386 38.989,37.386 ; v2(35.433,12.065) 29.337,5.969 18.034,5.969 ; v2(41.402,34.925) 41.441,34.964 41.441,35.792 39.848,37.386 38.989,37.386 ; 42.037,24.257 40.005,22.225 38.989,23.241 v2(38.989,29.972) 38.989,37.386 ; 10.922,30.099 11.508,29.513 14.429,29.513 v2(14.478,29.464) ; v2(14.478,29.464) 14.478,26.924 18.034,23.368 v2(18.034,20.828) 18.034,5.969
  other v1: 42.418,2.667 43.18,2.667 42.418,3.429 43.18,3.429 42.418,4.191 43.18,4.191 42.418,4.953 43.18,4.953 42.418,5.715 43.18,5.715 42.418,6.477 43.18,6.477 42.418,7.239 43.18,7.239 42.418,8.001 43.18,8.001 42.418,8.763 43.18,8.763 42.418,9.525 43.18,9.525 42.418,10.287 43.18,10.287 42.418,11.049 43.18,11.049 42.418,11.811 43.18,11.811 42.418,12.573 43.18,12.573 42.418,13.335 43.18,13.335 42.418,14.097 43.18,14.097 42.418,14.859 43.18,14.859 42.418,15.621 43.18,15.621 42.418,16.383 43.18,16.383 42.418,17.145 43.18,17.145 42.418,17.907 43.18,17.907 42.418,18.669 43.18,18.669 42.418,19.431 43.18,19.431 42.418,20.193 43.18,20.193 42.418,20.955 43.18,20.955 40.132,21.717 40.894,21.717 41.656,21.717 42.418,21.717 43.18,21.717 40.132,22.479 40.894,22.479 41.656,22.479 42.418,22.479 43.18,22.479 15.113,22.86 44.577,22.987 44.577,22.987 42.418,23.241 43.18,23.241 14.224,23.622 42.418,24.003 43.18,24.003 13.589,24.257 42.418,24.765 43.18,24.765 42.418,25.527 43.18,25.527 22.606,26.289 42.418,26.289 43.18,26.289 42.418,27.051 43.18,27.051 42.418,27.813 43.18,27.813 42.418,28.575 43.18,28.575 42.418,31.242 43.18,31.242 42.418,32.004 43.18,32.004 42.418,32.766 43.18,32.766 22.225,33.401 42.418,33.528 43.18,33.528 21.463,34.163 42.418,34.29 43.18,34.29 42.418,35.052 43.18,35.052 42.418,35.814 43.18,35.814 40.894,36.576 41.656,36.576 42.418,36.576 43.18,36.576 38.608,37.338 39.37,37.338 40.132,37.338 40.894,37.338 41.656,37.338 42.418,37.338 43.18,37.338
  other v2: 29.845,27.051 30.988,27.051 32.131,27.051 29.845,28.194 30.988,28.194 32.131,28.194 33.274,28.194 32.131,29.464
NetC3_1: C3.1 R8.1 U1.5 | length 23.6
  Top Layer w0.25: C3.1 9.779,34.293 10.597,35.111 19.118,35.111 25.997,28.232 U1.5
  Top Layer w1: R8.1 8.293,34.534 9.523,34.534 C3.1
NetC5_1: C5.1 R14.1 U4.4 U4.8 | length 26.9
  Top Layer w0.5: v2(7.366,16.637) 7.423,16.58 8.5,16.58 C5.1 ; C5.1@9.017,16.163 9.39,15.79 9.994,15.79 10.287,15.497 U4.8 ; C5.1@9.017,16.326 R14.1 ; U4.4 14.224,6.858 v2(14.224,5.334)
  Bottom Layer w0.5: v2(7.366,16.637) 7.366,12.993 7.659,12.7 10.541,12.7 14.859,8.382 14.859,5.65 14.474,5.264 14.154,5.264 v2(14.224,5.334)
NetC11_1: C11.1 U1.29 | length 7.6
  Top Layer w0.25: U1.29 35.123,27.032 35.269,26.886 35.269,23.659 36.228,22.7 38.009,22.7 38.354,22.355 C11.1
NetC12_1: C12.1 C13.1 L2.1 U1.30 | length 9.5
  Top Layer w0.25: U1.30 35.35,27.432 35.687,27.095 35.687,24.726 36.51,23.903 L2.1
  Top Layer w1: L2.1 39.863,23.903 39.89,23.93 C13.1
NetC14_1: C14.1 L1.2 U1.32 | length 5.4
  Top Layer w0.25: U1.32 36.751,28.232 37.211,27.772 37.211,27.543 37.19,27.522 37.19,27.257 L1.2
  Top Layer w1: L1.2 38.315,26.897 C14.1
NetC14_2: C14.2 C15.1 L3.1 | length 3.1
  Top Layer w1: C14.2 38.366,28.448 L3.1 39.89,28.433 C15.1
NetC18_1: C18.1 U1.37 Y1.1 | length 10.3
  Top Layer w0.25: U1.37@33.775,30.861 33.775,31.584 35.815,33.623 39.02,33.623 39.192,33.451 39.192,32.658 Y1.1@39.333,32.518
  Top Layer w1: Y1.1 39.315,32.27 C18.1
NetC19_1: C19.1 U1.38 Y1.3 | length 12.1
  Top Layer w0.25: U1.38@33.375,30.382 U1.38 33.375,32.154 34.925,33.704 34.925,34.925 34.925,37.446 C19.1@35.071,37.592
  Top Layer w1: C19.1 35.318,34.925 Y1.3
NetC20_1: C20.1 U1.39 | length 4.9
  Top Layer w0.25: U1.39@32.975,30.33 U1.39 32.975,33.001 33.945,33.971 33.945,34.266 33.818,34.266 C20.1
NetC24_1: C24.1 U1.45 Y2.1 | length 6.8
  Top Layer w0.25: U1.45 30.575,32.378 31.572,33.376 Y2.1
  Top Layer w1: C24.1 31.526,36.026 31.526,33.828 Y2.1
NetC25_1: C25.1 U1.46 Y2.2 | length 5.5
  Top Layer w0.25: Y2.2 29.134,33.376 30.175,32.334 U1.46
  Top Layer w1: C25.1 27.19,33.782 Y2.2
NetD1_A: D1.A D3.A Q1.1 R1.1 | length 16.8
  Top Layer w0.5: R1.1 R1.1@29.019,8.636 ; v2(29.083,9.906) 29.097,9.892 29.097,8.714 R1.1@29.019,8.636 ; 30.474,8.643 32.635,8.643 D1.A ; D3.A 30.61,8.636 R1.1@29.019,8.636
  Top Layer w1: v2(29.083,15.367) 29.169,15.281 Q1.1
  Bottom Layer w0.5: v2(29.083,9.906) 29.14,9.963 29.454,9.963 30.48,10.99 30.48,15.074 30.187,15.367 v2(29.083,15.367)
NetD1_C: D1.C D2.C SW.1 | length 34
  Top Layer w0.5: SW.1 2.904,2.748 3.475,2.748 4.191,2.032 28.339,2.032 29.863,3.556 D2.C 32.639,3.556 D1.C
NetD2_A: D2.A R2.2 U1.18 | length 40.8
  Top Layer w0.25: U1.18 31.375,22.092 32.512,20.955 v2(32.512,19.177)
  Top Layer w0.5: R2.2 35.179,3.606 D2.A@35.229,3.556 ; D2.A 35.661,3.556 36.366,2.851 36.646,2.851 v2(36.703,2.794)
  Bottom Layer w0.25: v2(32.512,19.177) 32.512,17.418 33.293,16.637 40.621,16.637 40.767,16.491 40.767,3.491 40.621,3.344 40.256,3.344 39.198,2.286 37.291,2.286 36.783,2.794 v2(36.703,2.794)
NetD3_C: D3.C Q2.2 | length 2.1
  Top Layer w0.5: Q2.2 26.002,6.488 27.066,6.488 27.585,5.969 D3.C
NetD4_C: D4.C R4.2 R5.2 R8.2 | length 5.7
  Top Layer w0.25: D4.C R8.2
  Top Layer w1: R4.2 R5.2 R8.2@6.703,34.492
NetD5_A: D5.A LS1.LEAD- Q3.3 | length 8.7
  Top Layer w1: D5.A 5.08,23.622 5.458,24 ; LS1.LEAD- 5.77,27.361 5.62,27.211 5.62,25.743 5.588,25.711 5.588,24.13 5.458,24 ; Q3.3 9.017,24 5.458,24
NetD6_1: D6.1 U1.14 | length 4.1
  Top Layer w0.25: U1.14 29.775,24.368 29.74,24.333 29.74,24.231 29.718,24.209 29.718,20.891 D6.1
NetD6_2: D6.2 R20.2 | length 2.1
  Top Layer w0.25: R20.2 28.471,19.299 28.471,19.13 28.579,19.022 29.937,19.022 D6.2
NetDG_2: DG.2 R15.2 | length 2.9
  Top Layer w0.5: DG.2 12.89,19.178 12.89,16.475 R15.2
NetDR_2: DR.2 R16.2 | length 2.8
  Top Layer w0.5: R16.2 DR.2
NetH2_01: H2.01 U1.23 | length 8.1
  Top Layer w0.25: U1.23 33.375,23.323 34.185,22.513 34.185,19.195 34.331,19.049 35.942,19.049 H2.01
NetH2_02: H2.02 R21.2 U1.24 | length 9.6
  Top Layer w0.25: U1.24 34.3,24.632 34.897,24.035 34.897,21.082 R21.2
  Top Layer w0.5: R21.2 35.286,20.693 35.286,20.105 35.579,19.812 37.634,19.812 38.777,18.669 H2.02
NetL1_1: L1.1 L2.2 U1.31 | length 5.8
  Top Layer w0.25: U1.31 35.431,27.832 36.068,27.195 36.068,25.546 36.214,25.4 36.803,25.4 L1.1
  Top Layer w1: L1.1 36.884,25.373 L2.2
NetQ2_1: Q2.1 R6.2 U1.16 | length 49.7
  Top Layer w0.25: U1.16 30.575,21.368 v2(31.242,20.701)
  Top Layer w0.5: R6.2 25.659,3.429 25.952,3.722 Q2.1@25.952,4.605 ; Q2.1@25.919,4.605 Q2.1@25.952,4.605 ; Q2.1 Q2.1@25.952,4.605 ; v2(27.178,3.683) 27.178,3.727 26.3,4.605 Q2.1@25.952,4.605
  Bottom Layer w0.25: v2(27.178,3.683) 32.216,3.683 32.217,3.684 40.24,3.684 40.386,3.831 40.386,15.983 40.24,16.129 33.02,16.129 31.242,17.907 v2(31.242,20.701)
NetQ3_1: Q3.1 R7.1 | length 2.8
  Top Layer w1: R7.1 9.906,29.035 9.967,28.974 Q3.1
NetR3_2: R3.2 S2.1 U1.20 | length 39.2
  Top Layer w0.25: U1.20 32.175,22.054 v2(33.528,20.701)
  Top Layer w1: R3.2 37.211,4.191 37.829,3.573 39.243,3.573 S2.1 39.243,2.906 40.655,2.906 v2(40.894,2.667)
  Bottom Layer w0.25: v2(33.528,20.701) 33.528,17.164 33.674,17.018 41.002,17.018 41.148,16.872 41.148,3.07 40.894,2.816 v2(40.894,2.667)
NetR7_2: R7.2 R13.2 U1.7 | length 26.7
  Top Layer w0.25: R7.2 10.791,30.635 11.684,31.528 11.684,34.036 12.419,34.771 18.696,34.771 26.035,27.432 U1.7
  Top Layer w1: R13.2 R7.2
NetR9_1: R9.1 U2.12 | length 4.4
  Top Layer w0.5: U2.12 20.789,29.902 21.082,29.609 R9.1
NetR10_1: R10.1 U1.8 U2.13 | length 17.9
  Top Layer w0.25: 18.652,32.512 20.193,32.512 25.673,27.032 U1.8
  Top Layer w0.5: R10.1 18.279,33.909 18.572,33.616 U2.13
NetR11_1: R11.1 U1.9 U2.14 | length 18.4
  Top Layer w0.25: v2(20.066,31.623) 25.057,26.632 U1.9
  Top Layer w0.5: R11.1 14.432,32.205 15.853,32.205 16.16,32.512 v2(17.399,32.512) 17.399,32.431 17.327,32.359 17.327,31.652 17.272,31.597 U2.14
  Bottom Layer w0.5: v2(17.399,32.512) 19.177,32.512 v2(20.066,31.623)
NetR12_1: R12.1 U2.7 | length 2.4
  Top Layer w0.5: U2.7 17.327,26.197 17.327,25.345 17.718,24.954 17.718,24.037 R12.1
NetR15_1: R15.1 U4.6 | length 2.9
  Top Layer w0.5: U4.6 12.827,14.704 R15.1
NetR16_1: R16.1 U4.7 | length 3
  Top Layer w0.5: R16.1 11.303,13.843 11.526,13.62 11.526,11.966 U4.7
NetR17_1: R17.1 U4.2 | length 2.4
  Top Layer w0.5: U4.2 11.607,6.935 11.607,4.804 R17.1
OUT: C1.1 C2.1 Q1.2 R1.2 T3.1 U3.2 | length 18.2
  Top Layer w1: C1.1 C2.1 21.651,8.482 21.801,8.632 22.383,8.632 22.387,8.636 R1.2 ; U3.2 27.404,13.208 ; R1.2@27.404,9.144 27.404,13.208 ; T3.1 27.404,16.101 27.404,13.208 ; 27.879,11.877 Q1.2
VCC: B1.1 C6.1 C7.1 D5.C LS1.LEAD+ R4.1 T1.1 U3.3 U4.5 | length 49.5
  Top Layer w0.5: T1.1 R4.1 ; U4.5 14.097,11.999 14.544,11.999
  Top Layer w1: R4.1@2.633,32.756 2.633,28.524 1.47,27.361 LS1.LEAD+ 1.267,27.258 D5.C 1.267,23.21 1.998,22.479 13.511,22.479 14.097,21.893 14.097,18.923 B1.1
  Top Layer w1.5: 14.544,11.999 C6.1 B1.1 17.653,18.415 22.658,18.415 U3.3@25.461,15.612
pads on no net: FM1.1 FM2.1 J1.2 J1.3 J1.4 LS1.3 U1.3 U1.4 U1.6 U1.10 U1.11 U1.15 U1.17 U1.19 U1.21 U1.22 U1.25 U1.26 U1.27 U1.28 U1.40 U1.41 U1.42 U1.43 U1.44 U1.47 U1.48 U2.3 U2.8 U2.9 U2.10 U2.11 U4.1
copper on no net:
  other v1: 64.135,30.607

## Polygon pours and split planes (outlines as drawn)
GND on Top Layer "GND_L01_P025" (solid, pour order 25): 42.164,29.475 42.164,30.469 42.587,30.469 43.561,30.226 50.673,30.226 50.673,28.575 46.863,28.575 46.863,27.94 50.673,27.94 50.673,26.289 46.355,26.289 46.355,26.797 50.165,26.797 50.165,27.432 46.355,27.432 46.355,29.083 50.165,29.083 50.165,29.718 43.561,29.718 42.587,29.475
GND on Top Layer "GND_L01_P028" (solid, pour order 28): 46.355,26.289 46.355,25.146 50.165,25.146 50.165,24.511 46.355,24.511 46.355,22.86 50.165,22.86 50.165,18.669 50.673,18.669 50.673,23.368 46.863,23.368 46.863,24.003 50.673,24.003 50.673,25.654 46.863,25.654 46.863,26.289
GND on Top Layer "GND_L01_P029" (solid, pour order 29): 44.323,29.718 44.323,22.733 44.831,22.733 44.831,29.718
GND on Top Layer "GND_L01_P001" (solid, pour order 1): 42.037,2.159 43.561,2.159 43.561,29.108 42.037,29.108
GND on Top Layer "GND_L01_P000" (solid, pour order 0): 29.21,30.099 33.909,30.099 33.909,25.273 29.21,25.273
GND on Top Layer "GND_L01_P010" (solid, pour order 10): 42.129,27.432 40.894,27.432 40.894,22.86 39.243,22.86 39.243,21.463 36.195,21.463 36.195,20.066 42.164,20.066
GND on Top Layer "GND_L01_P009" (solid, pour order 9): 36.322,38.1 42.291,38.1 42.291,33.274 41.021,33.274 40.894,33.401 40.894,34.036 38.989,34.036 38.989,36.195 36.322,36.195
GND on Top Layer "GND_L01_P006" (solid, pour order 6): 42.126,30.836 43.561,30.836 43.561,38.1 42.126,38.1
GND on Bottom Layer "GND_L02_P031" (solid, pour order 31): 41.68,29.083 45.085,29.083 45.085,2.159 41.886,2.159
GND on Bottom Layer "GND_L02_P007" (solid, pour order 7): -0.508,38.1 43.561,38.1 43.561,21.463 -0.508,21.463
no net on Top Solder "GND_L01_P029" (solid): 44.323,29.718 44.323,22.733 44.831,22.733 44.831,29.718
no net on Top Solder "GND_L01_P028" (solid): 46.355,26.289 46.355,25.146 50.165,25.146 50.165,24.511 46.355,24.511 46.355,22.86 50.165,22.86 50.165,18.669 50.673,18.669 50.673,23.368 46.863,23.368 46.863,24.003 50.673,24.003 50.673,25.654 46.863,25.654 46.863,26.289
no net on Top Solder "GND_L01_P025" (solid): 42.164,29.475 42.164,30.469 42.587,30.469 43.561,30.226 50.673,30.226 50.673,28.575 46.863,28.575 46.863,27.94 50.673,27.94 50.673,26.289 46.355,26.289 46.355,26.797 50.165,26.797 50.165,27.432 46.355,27.432 46.355,29.083 50.165,29.083 50.165,29.718 43.561,29.718 42.587,29.475

## Silkscreen, mask and mechanical layers (free items; w line width, h text height)
Top Overlay:
  text "Smart Wallet DP2 - HLM" at -0.127,38.371 h1.52